# Altium PCB HV_Module.PCBDOC (part 1 of 2)
Units mm, origin at the board's own origin, x right, y up, seen from the top; angles counter-clockwise.
Board outline 118 x 86 mm, 4 copper layers (Top, GP1(GND), L3, Bot), stack 1.648 mm thick; 254 components, 171 nets, 762 pads, 0 vias.
Unrouted connection lines stored in the file: 464.
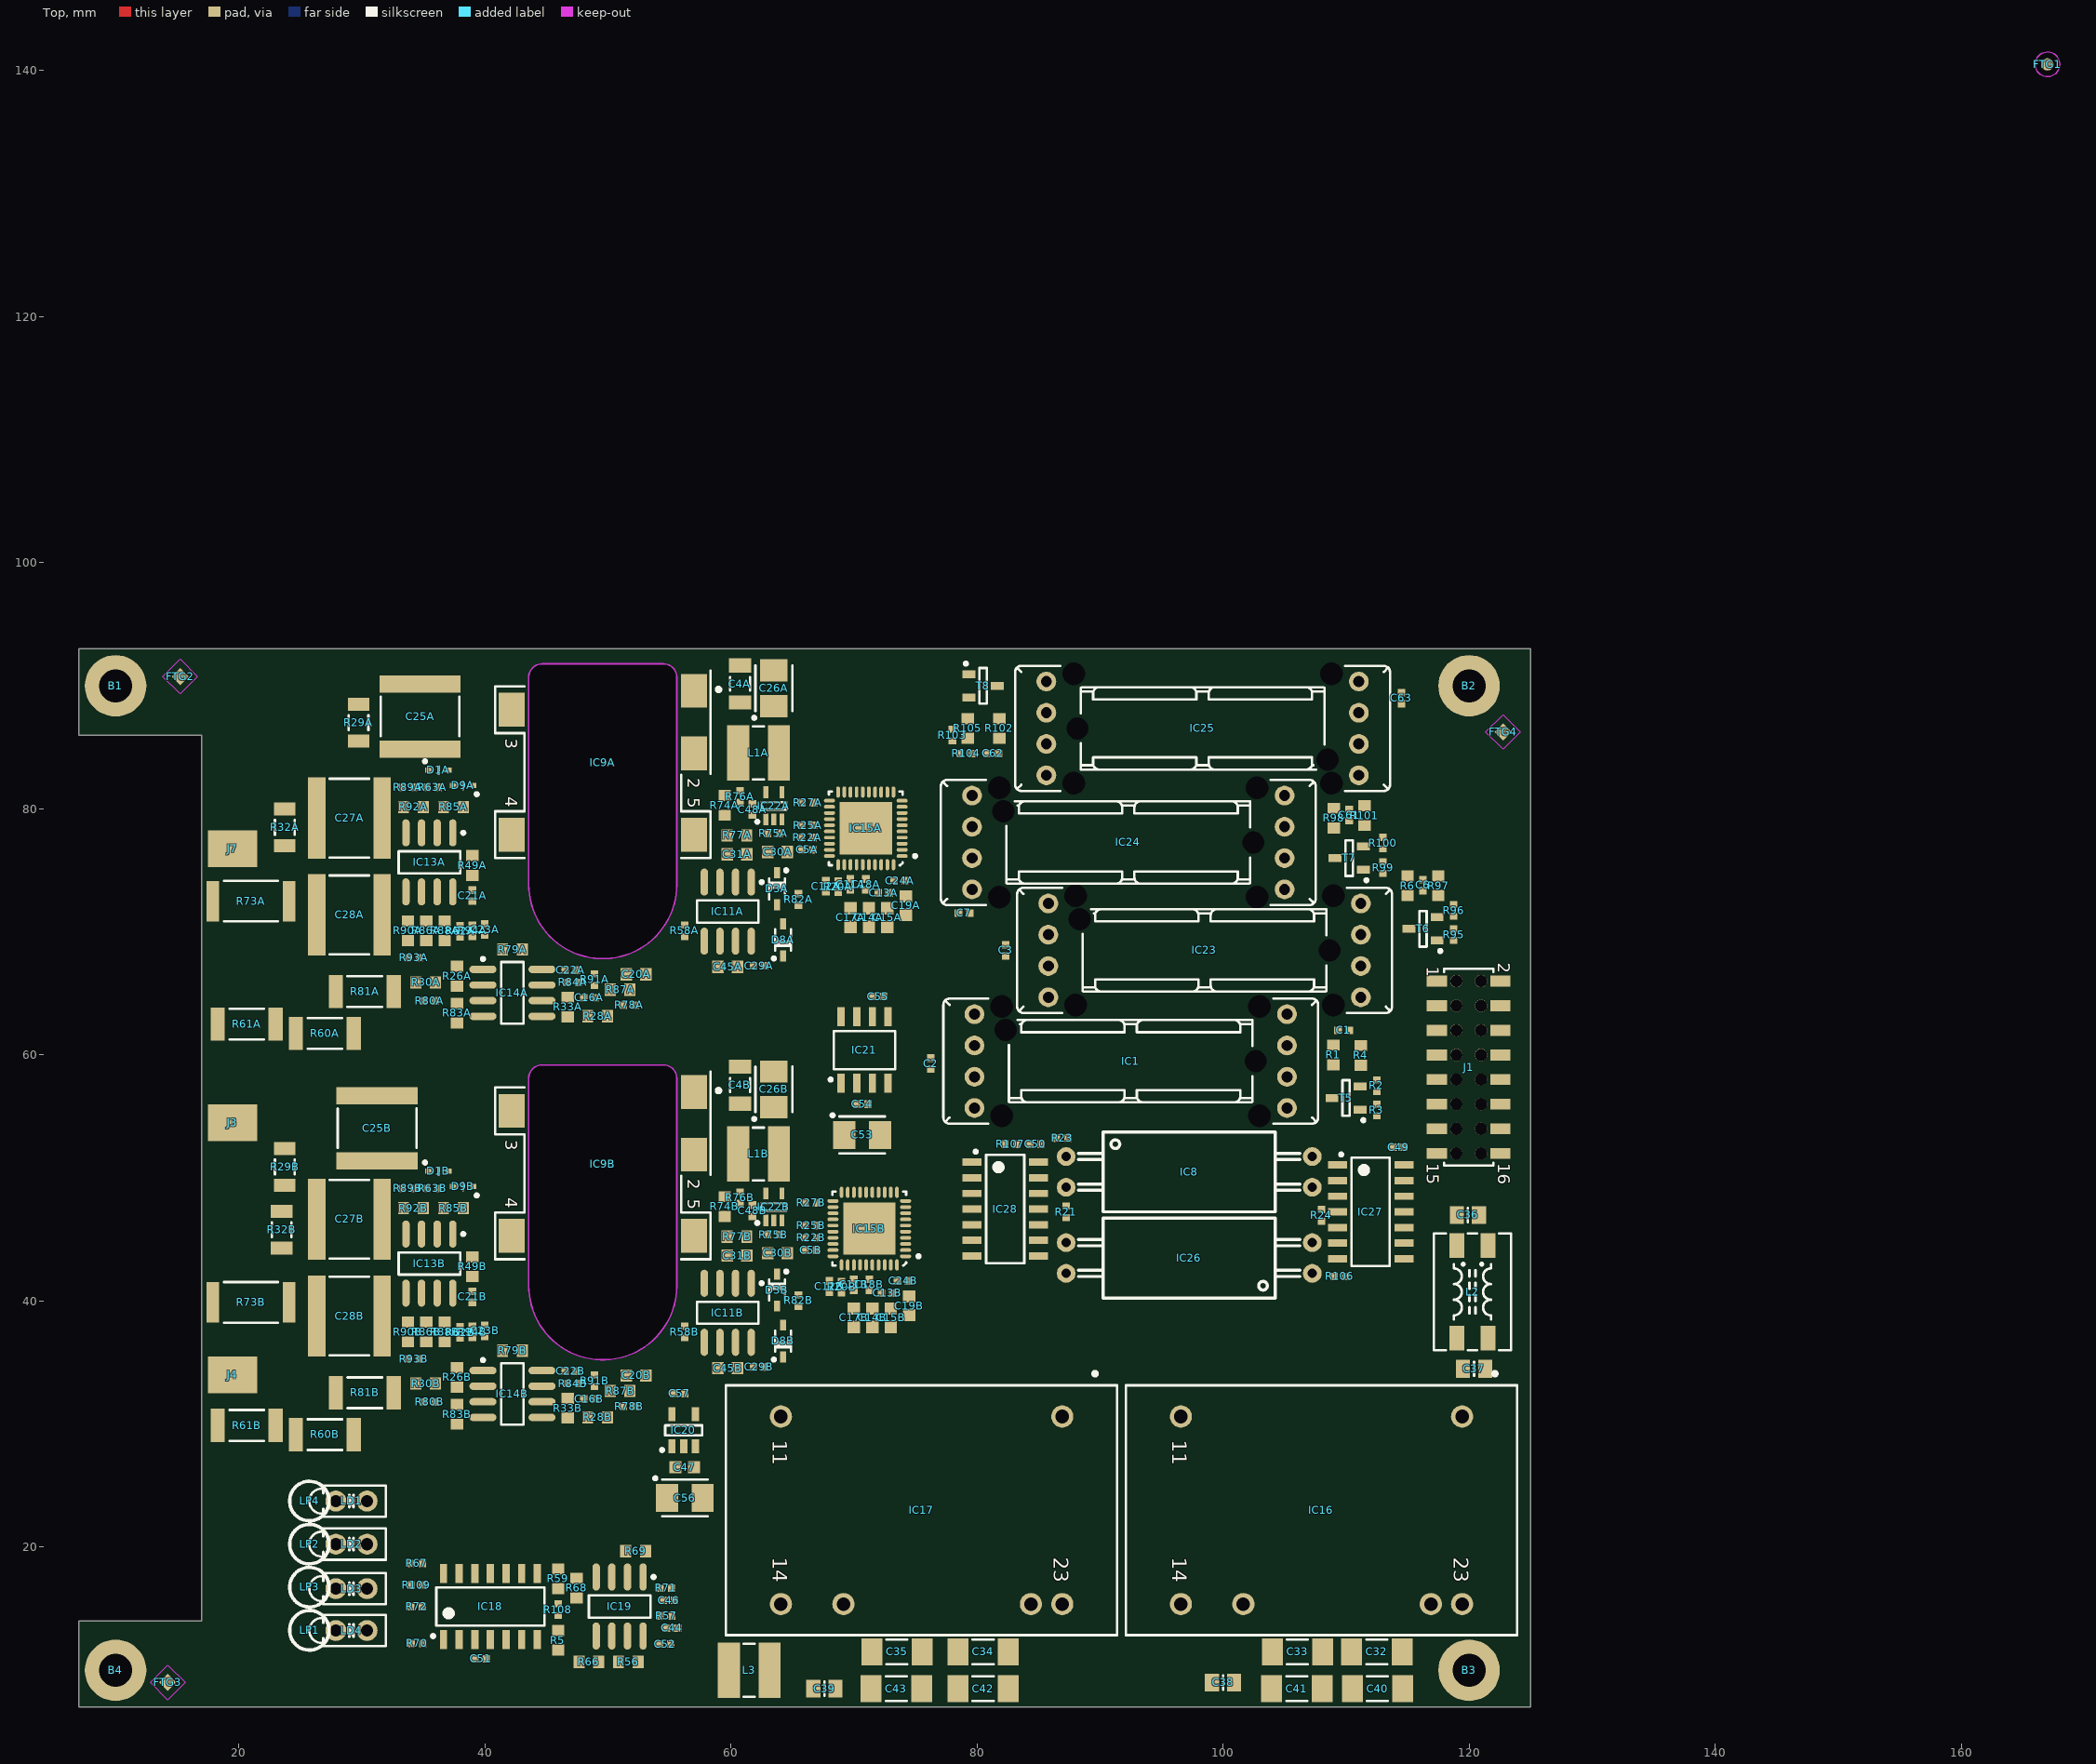
[diagram p0: Top view]
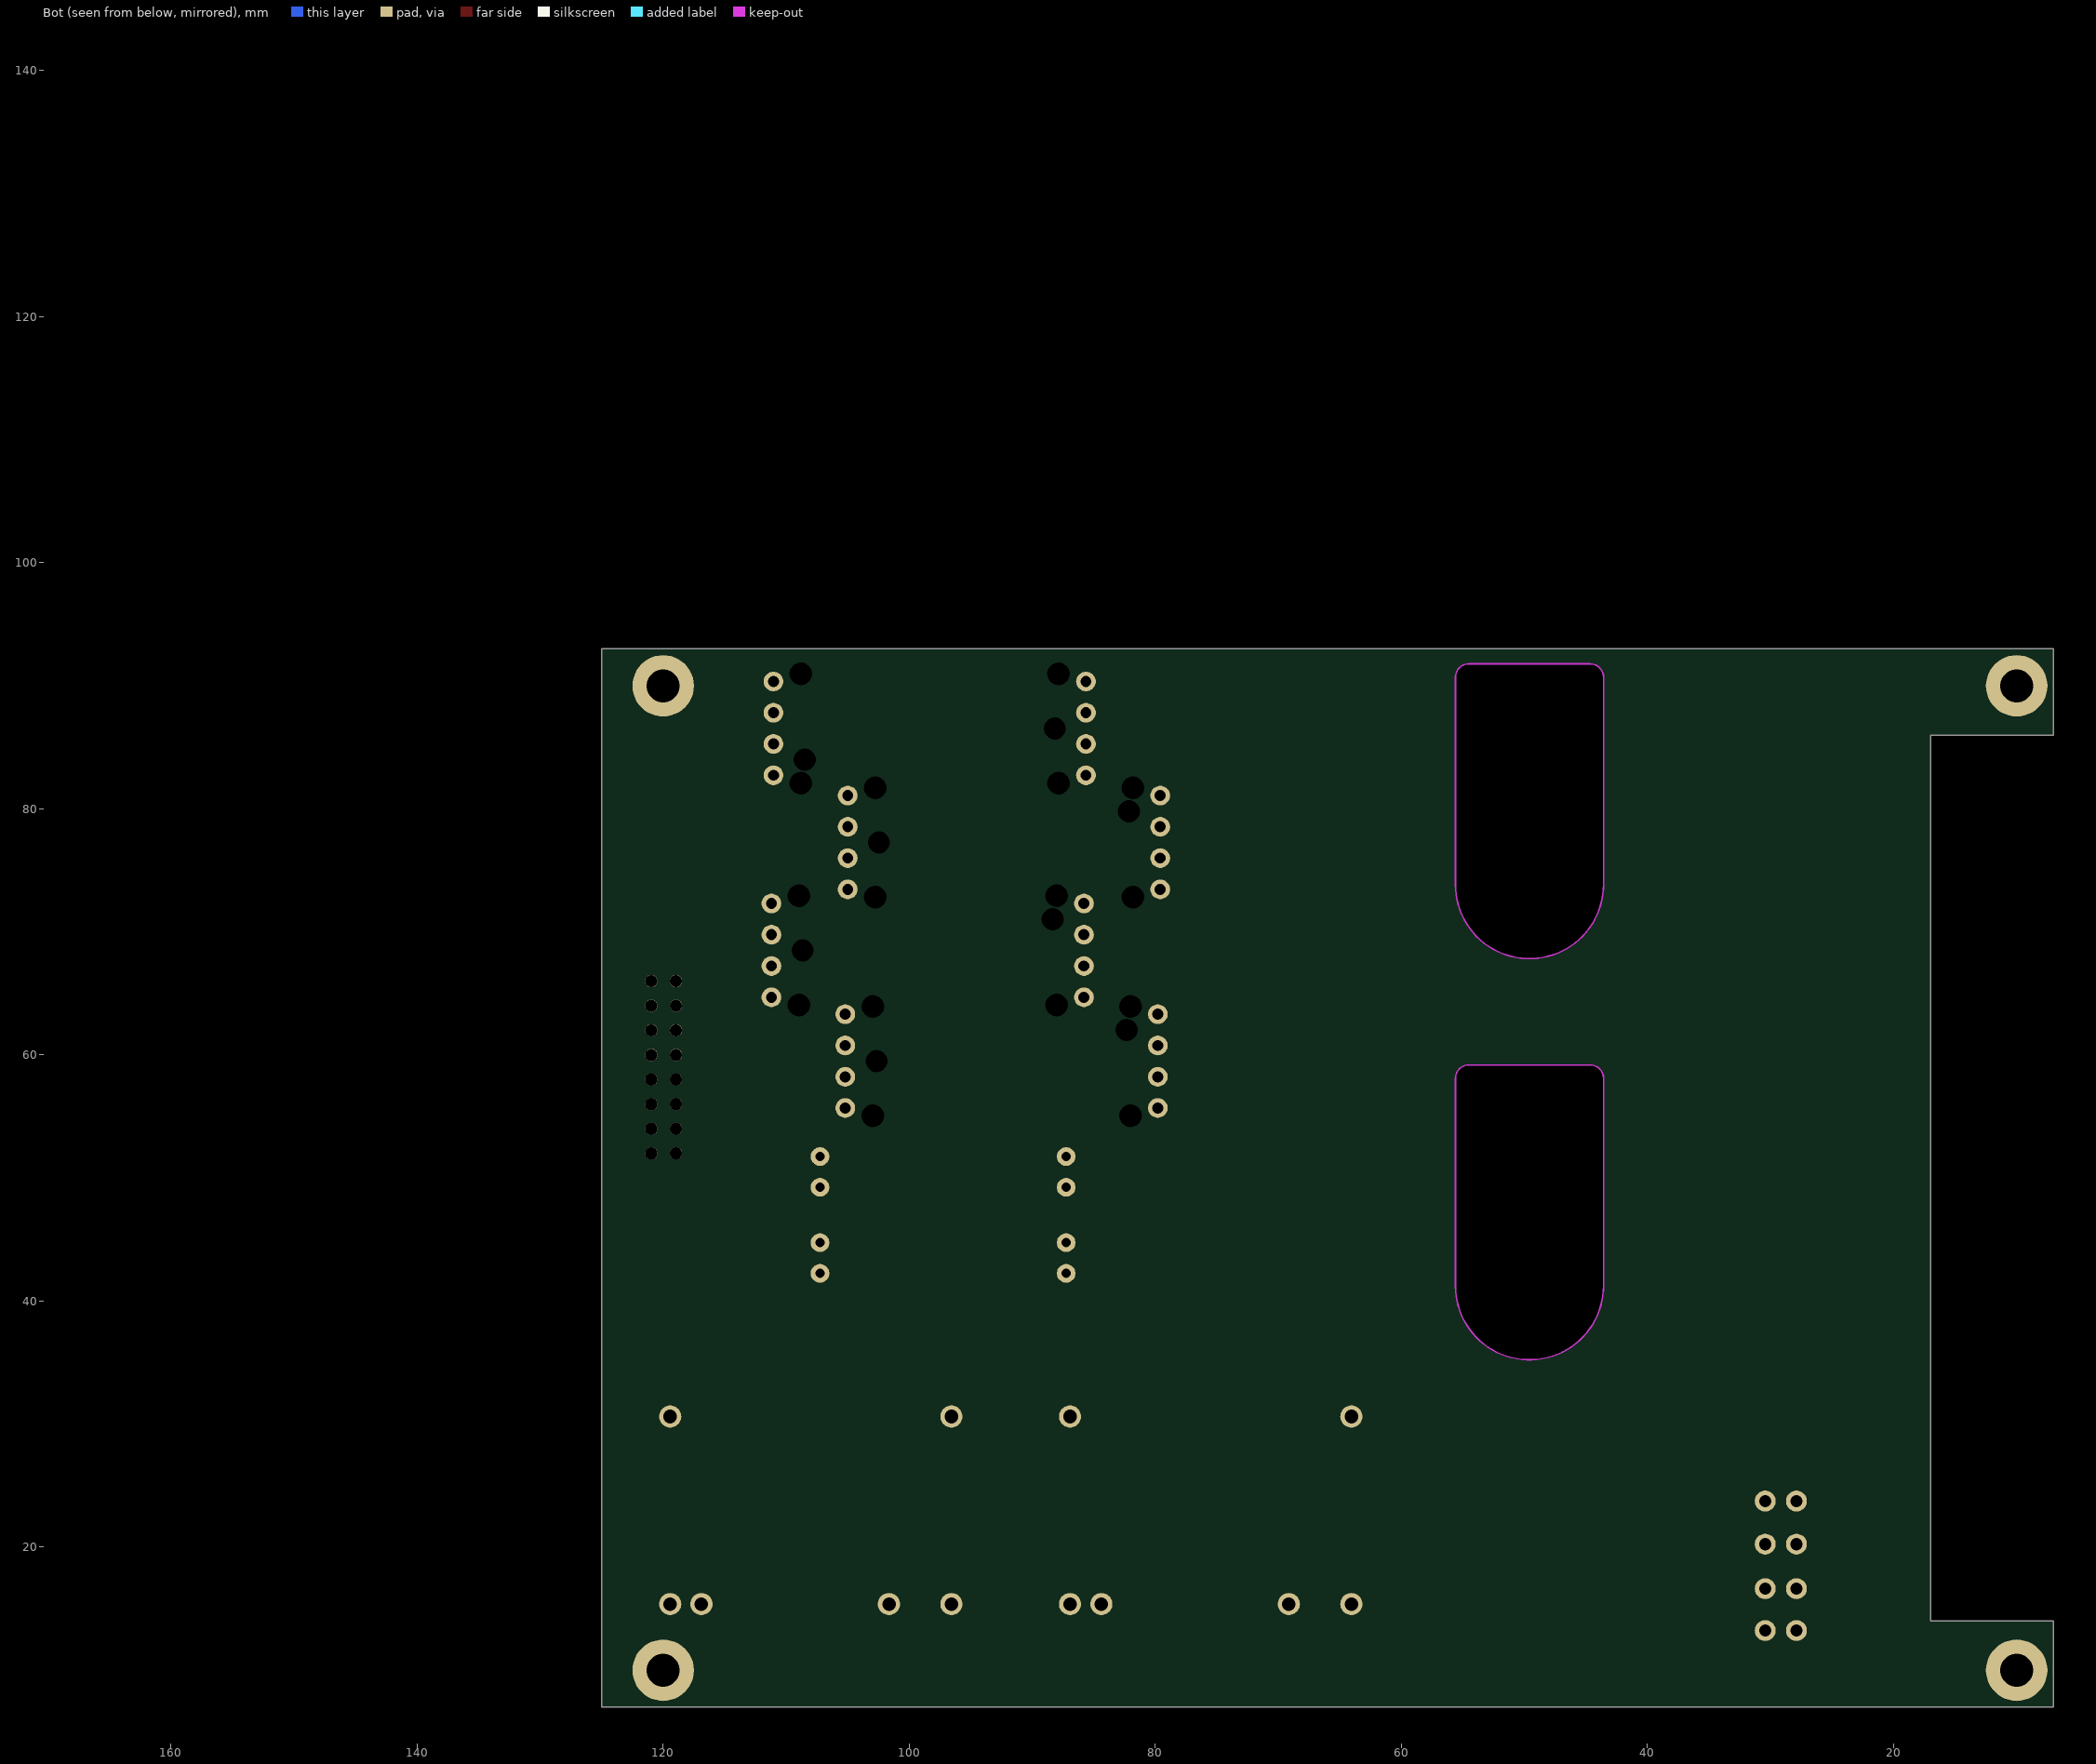
[diagram p1: Bot view, seen from below]
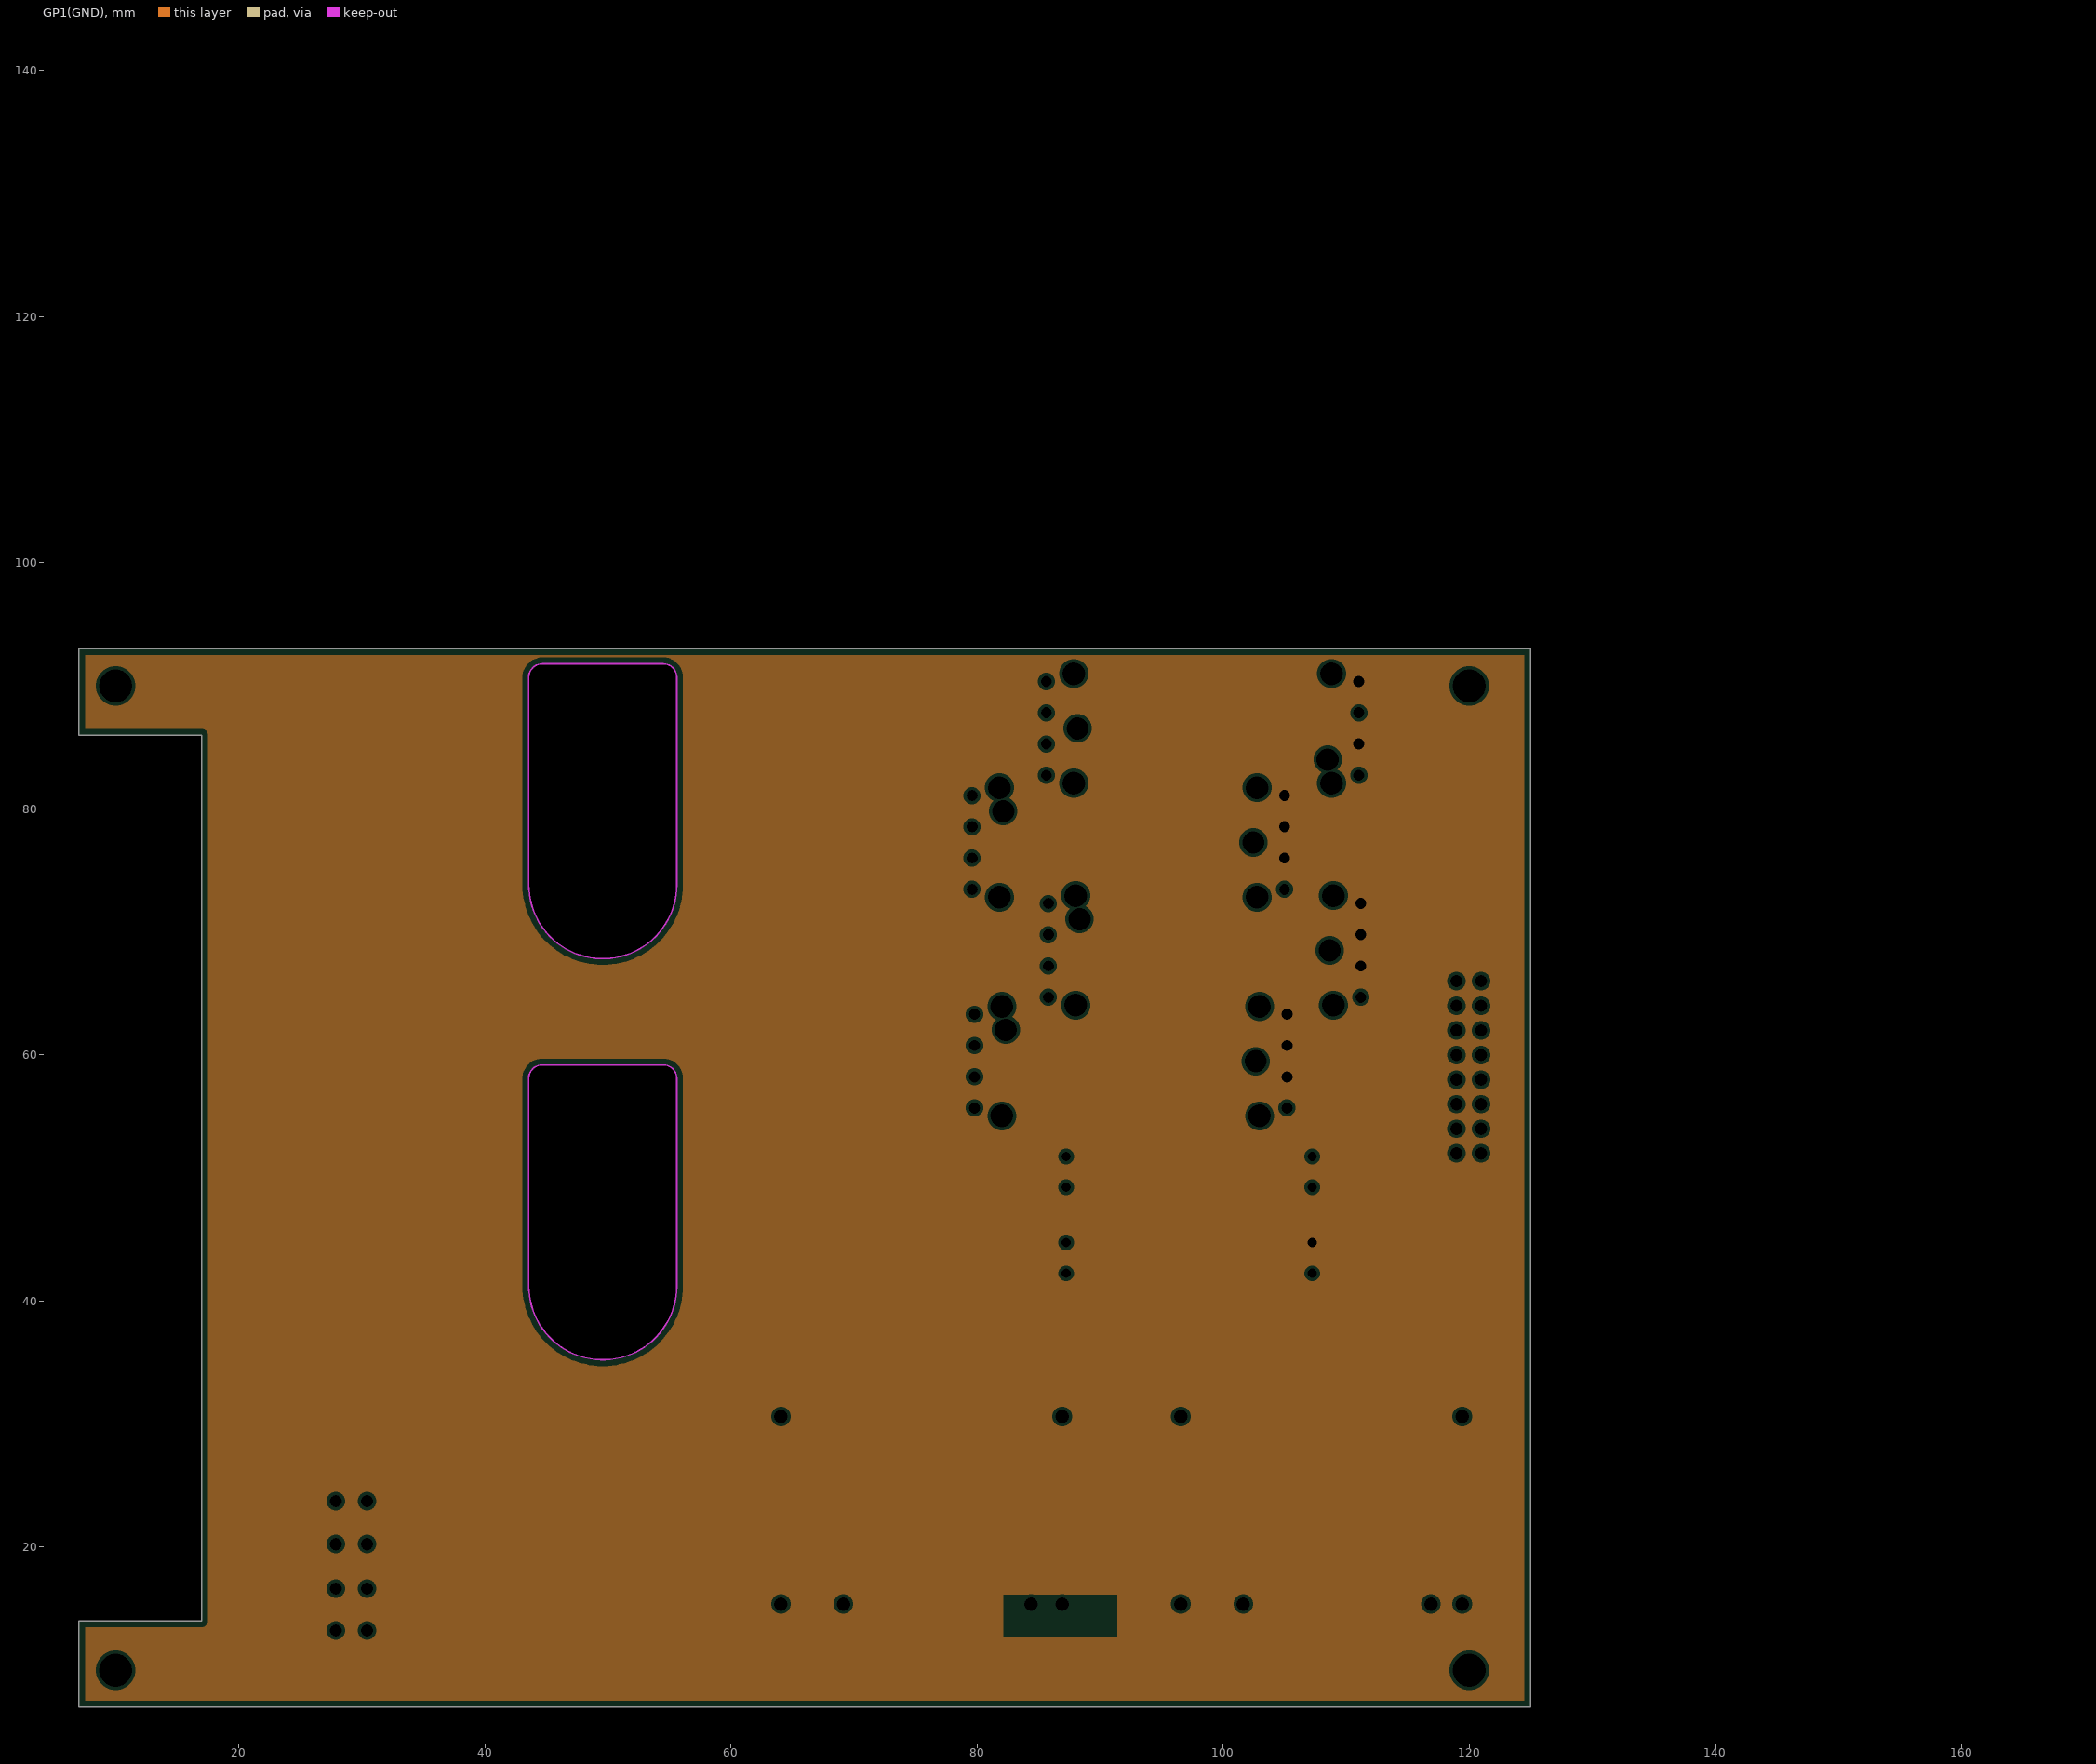
[diagram p2: GP1(GND), clearances drawn from the general rule]

## Layer stack, top to bottom
TopSolder: solder mask 0.0102, Solder Resist, Dk 3.5
Top: signal copper 0.058
Dielectric1: core 0.18, FR-4, Dk 4.2
GP1(GND): plane copper 0.036, net GND
Dielectric 3: prepreg 1.1, FR-4, Dk 4.2
L3: signal copper 0.036
Dielectric2: core 0.18, FR-4, Dk 4.2
Bot: signal copper 0.058
BottomSolder: solder mask 0.0102, Solder Resist, Dk 3.5

## Board outline
7,7 7,14 17,14 17,86 7,86 7,93 125,93 125,7

## Design rules (kind name [scope] priority, off if disabled: settings)
AcuteAngle [All] p1: minimum=6.00000000000000E+0001 checktracksonly=FALSE
BoardOutlineClearance [not (OnLayer('TopOverlay')  or  OnLayer('BottomOverlay') )] p1: gap=0.254 ignorepadtopadclearanceinfootprint=FALSE except(0: Arc-SplitContinuation Track-SplitContinuation SMDPad-SplitContinuation THPad-SplitContinuation Via-SplitContinuation Fill-SplitContinuation Poly-SplitContinuation Region-SplitContinuation Text-SplitContinuation)
Clearance Clearance_HV [InNetClass('HV') vs not InNetClass('HV')] p1: gap=1 ignorepadtopadclearanceinfootprint=FALSE
Clearance Clearance_balancing [InNamedPolygon('balancing')            or InNamedPolygon('balancing_top')] p2: gap=0.3 ignorepadtopadclearanceinfootprint=FALSE
Clearance Clearance_DIFF [(InDifferentialPairClass('All Differential Pairs'))] p3: gap=0.127 ignorepadtopadclearanceinfootprint=FALSE except(0: Arc-Hole Track-Hole SMDPad-Hole THPad-Hole Via-Hole Fill-Hole Poly-Hole Region-Hole Text-Hole; 0.254: Arc-Poly Track-Poly SMDPad-Poly THPad-Poly Via-Poly Fill-Poly Poly-Poly Poly-Region Poly-Text)
Clearance [All] p4: gap=0.127 ignorepadtopadclearanceinfootprint=FALSE except(0: Arc-Hole Track-Hole SMDPad-Hole THPad-Hole Via-Hole Fill-Hole Poly-Hole Region-Hole Text-Hole; 0.381: Arc-Poly Track-Poly SMDPad-Poly THPad-Poly Via-Poly Fill-Poly Poly-Poly)
ComponentClearance [All] p1 off: gap=0.254 collisioncheckmode=3 verticalgap=0.254 showdistances=FALSE
DiffPairsRouting [All] p1: maxlimit=0.178 minlimit=0.152 mostfreqgap=0.152 toplayer_minwidth=0.127 toplayer_maxwidth=0.152 toplayer_prefwidth=0.152 midlayer1_minwidth=0.127 midlayer1_maxwidth=0.152 midlayer1_prefwidth=0.152 bottomlayer_minwidth=0.127 bottomlayer_maxwidth=0.152 bottomlayer_prefwidth=0.152 maxuncoupledlength=12.7
FabricationTestPointUsage TestPointUsage [All] p1: valid=0 allowmultiple=FALSE
FabricationTestpoint Testpoint [All] p1: side=3 testpointundercomponent=TRUE minsize=1.016 maxsize=2.54 preferedsize=1.524 minholesize=0.508 maxholesize=1.016 preferedholesize=0.813 testpointgrid=0.025 allowsidetop=TRUE allowsidebottom=TRUE usegrid=TRUE gridtolerance=0
Height [All] p1 off: minheight=0 maxheight=25.4 prefheight=12.7
HoleSize [All] p1: absolutevalues=TRUE maxlimit=3.81 minlimit=0.025 maxpercent=80.000 minpercent=20.000
HoleToHoleClearance [All] p1: gap=0.025 allowstackedmicrovias=TRUE
MinimumSolderMaskSliver [All] p1: minsoldermaskwidth=0
PlaneClearance PlaneClearance_HV [InNetClass('HV')] p1: clearance=1
PlaneClearance [All] p2: clearance=0.254
PlaneConnect [All] p1: planeconnectstyle=Direct reliefexpansion=0.508 reliefentries=4 reliefconductorwidth=0.254 reliefairgap=0.254
PolygonConnect PolygonConnect_pad [(InPadClass('All Pads'))] p1: connectstyle=Relief reliefconductorwidth=0.254 reliefentries=4 polygonreliefangle="90 Angle" airgapwidth=0.254
PolygonConnect [All] p2: connectstyle=Direct reliefconductorwidth=0.254 reliefentries=4 polygonreliefangle="45 Angle" airgapwidth=0.254
RoomDefinition U_HV_PWR_STAGE2 [InComponentClass('U_HV_PWR_STAGE2')] p1: confinementstyle=ConfineIn formatcopy=TRUE lockcomponents=FALSE outline 16.55,26.9 66.8,26.9 66.8,60.65 16.55,60.65
RoomDefinition U_ADC_DAC1 [InComponentClass('U_ADC_DAC1')] p2: confinementstyle=ConfineIn formatcopy=TRUE lockcomponents=FALSE outline 75.22,82.776 65.22,82.776 65.22,69.816 75.22,69.816
RoomDefinition U_HV_PWR_STAGE1 [InComponentClass('U_HV_PWR_STAGE1')] p3: confinementstyle=ConfineIn formatcopy=TRUE lockcomponents=FALSE outline 16.55,59.5 66.8,59.5 66.8,93.25 16.55,93.25
RoomDefinition U_LED_indicators [InComponentClass('U_LED_indicators')] p4: confinementstyle=ConfineIn formatcopy=TRUE lockcomponents=FALSE outline 18,10.3 46,10.3 46,21.8 18,21.8
RoomDefinition U_ADC_DAC2 [InComponentClass('U_ADC_DAC2')] p5: confinementstyle=ConfineIn formatcopy=TRUE lockcomponents=FALSE outline 75.5,50.25 65.5,50.25 65.5,37.29 75.5,37.29
RoomDefinition U_Supply_5V_ISOL [InComponentClass('U_Supply_5V_ISOL')] p6: confinementstyle=ConfineIn formatcopy=TRUE lockcomponents=FALSE outline 55.25,6 124.75,6 124.75,37.25 55.25,37.25
RoomDefinition U_Isolators [InComponentClass('U_Isolators')] p7: confinementstyle=ConfineIn formatcopy=TRUE lockcomponents=FALSE outline 75,37.5 115.75,37.5 115.75,92.5 75,92.5
RoomDefinition HV_Module [InComponentClass('HV_Module')] p8: confinementstyle=ConfineIn formatcopy=TRUE lockcomponents=FALSE outline 115.25,46.25 125,46.25 125,75.75 115.25,75.75
RoutingVias [All] p1: holewidth=0.2 width=0.5 viastyle="Through Hole" minholewidth=0.2 minwidth=0.5 maxholewidth=0.711 maxwidth=1.27
SilkToSilkClearance [All] p1: silktosilkclearance=0
SilkToSolderMaskClearance SilkscreenOverComponentPads [IsPad] p1: minsilkscreentomaskgap=0 clearancetoexposedcopper=TRUE
SolderMaskExpansion [All] p1: expansion=0.051 istentingtop=FALSE
Width Z50R [InNetClass('SPI')] p1: maxlimit=0.298 minlimit=0.221 preferedwidth=0.302 toplayer_minwidth=0.298 midlayer1_maxwidth=0.221 midlayer1_prefwidth=0.225 bottomlayer_minwidth=0.298 impedanceprofiledriven=TRUE impedanceprofileid={0EAE177B-5537-4F3A-BB17-587E98DE51B5} impedanceprofilevalue=50.000000 minimp=50.000000 maximp=50.000000 favimp=50.000000
Width [All] p2: maxlimit=1.27 minlimit=0.127 preferedwidth=0.127
18 further rules are at their usual default settings.

## Classes and differential pairs
component class U_LED_indicators: C44 C46 C51 C52 IC18 IC19 LD1 LD2 LD3 LD4 LP1 LP2 LP3 LP4 R5 R56 R57 R59 R66 R67 R68 R69 R70 R71 R72 R108 R109
channel class HV_PWR_STAGE: U_HV_PWR_STAGE1 U_HV_PWR_STAGE2
channel class ADC_DAC: U_ADC_DAC1 U_ADC_DAC2
component class U_HV_PWR_STAGE1: C4A C16A C20A C21A C22A C23A C25A C26A C27A C28A C29A C30A C31A C45A C48A D1A D3A D8A D9A IC9A IC11A IC13A IC14A IC22A L1A R26A R28A R29A R30A R32A R33A R49A R58A R60A R61A R62A R63A R73A R74A R75A R76A R77A R78A R79A R80A R81A R82A R83A R84A R85A R86A R87A R88A R89A R90A R91A R92A R93A R94A
component class U_ADC_DAC2: C5B C11B C12B C13B C14B C15B C17B C18B C19B C24B IC15B R20B R22B R25B R27B
component class U_ADC_DAC1: C5A C11A C12A C13A C14A C15A C17A C18A C19A C24A IC15A R20A R22A R25A R27A
component class U_Supply_5V_ISOL: C32 C33 C34 C35 C36 C37 C38 C39 C40 C41 C42 C43 C47 C56 C57 IC16 IC17 IC20 L2 L3
component class U_Isolators: C1 C2 C3 C6 C7 C49 C50 C61 C62 C63 IC1 IC8 IC23 IC24 IC25 IC26 IC27 IC28 R1 R2 R3 R4 R6 R21 R23 R24 R95 R96 R97 R98 R99 R100 R101 R102 R103 R104 R105 R106 R107 T5 T6 T7 T8
component class U_HV_PWR_STAGE2: C4B C16B C20B C21B C22B C23B C25B C26B C27B C28B C29B C30B C31B C45B C48B D1B D3B D8B D9B IC9B IC11B IC13B IC14B IC22B L1B R26B R28B R29B R30B R32B R33B R49B R58B R60B R61B R62B R63B R73B R74B R75B R76B R77B R78B R79B R80B R81B R82B R83B R84B R85B R86B R87B R88B R89B R90B R91B R92B R93B R94B
component class HV_Module: B1 B2 B3 B4 C53 C54 C55 FTG1 FTG2 FTG3 FTG4 IC21 J1 J3 J4 J7

## Components (designator, comment, footprint, x,y, rotation, side; value= is the part's Value field where it differs from the comment)
B1 "Plated Hole" MTG270_500 10,90 r0 top
B2 "Plated Hole" MTG270_500 120,90 r0 top
B3 "Plated Hole" MTG270_500 120,10 r0 top
B4 "Plated Hole" MTG270_500 10,10 r0 top
C1 "1uF" CAPC1005X55N 109.8,62.004 r180 top
C2 "1uF" CAPC1005X55N 76.25,59.3 r90 top
C3 "1uF" CAPC1005X55N 82.34,68.5 r90 top
C4A "22uF" CAPC3216X180N 60.75,90.15 r270 top (schematic designator C4)
C4B "22uF" CAPC3216X180N 60.75,57.55 r270 top (schematic designator C4)
C5A "1uF" CAPC1005X55N 66.22,76.666 r0 top (schematic designator C5)
C5B "1uF" CAPC1005X55N 66.5,44.14 r0 top (schematic designator C5)
C6 "1uF" CAPC1005X55N 116.25,73.8 r90 top
C7 "1uF" CAPC1005X55N 78.95,71.534 r0 top
C11A "10nF" CAPC1005X55N 69.72,73.856 r90 top (schematic designator C11)
C11B "10nF" CAPC1005X55N 70,41.33 r90 top (schematic designator C11)
C12A "1uF" CAPC1005X55N 67.72,73.716 r90 top (schematic designator C12)
C12B "1uF" CAPC1005X55N 68,41.19 r90 top (schematic designator C12)
C13A "1uF" CAPC1005X55N 72.42,73.166 r0 top (schematic designator C13)
C13B "1uF" CAPC1005X55N 72.7,40.64 r0 top (schematic designator C13)
C14A "10uF" CAPC1608X80N 71.22,71.166 r90 top (schematic designator C14)
C14B "10uF" CAPC1608X80N 71.5,38.64 r90 top (schematic designator C14)
C15A "10uF" CAPC1608X80N 72.72,71.166 r90 top (schematic designator C15)
C15B "10uF" CAPC1608X80N 73,38.64 r90 top (schematic designator C15)
C16A "10nF" CAPC1005X55N 48.5,64.65 r180 top (schematic designator C16)
C16B "10nF" CAPC1005X55N 48.5,32.05 r180 top (schematic designator C16)
C17A "10uF" CAPC1608X80N 69.72,71.166 r90 top (schematic designator C17)
C17B "10uF" CAPC1608X80N 70,38.64 r90 top (schematic designator C17)
C18A "100nF" CAPC1005X55N 70.97,73.856 r90 top (schematic designator C18)
C18B "100nF" CAPC1005X55N 71.25,41.33 r90 top (schematic designator C18)
C19A "10uF" CAPC1608X80N 74.22,72.14 r90 top (schematic designator C19)
C19B "10uF" CAPC1608X80N 74.5,39.614 r90 top (schematic designator C19)
C20A "220nF" CAPC1608X87N 52.3,66.55 r180 top (schematic designator C20)
C20B "220nF" CAPC1608X87N 52.3,33.95 r180 top (schematic designator C20)
C21A "100nF" CAPC1005X55N 39,72.951 r90 top (schematic designator C21)
C21B "100nF" CAPC1005X55N 39,40.351 r90 top (schematic designator C21)
C22A "100nF" CAPC1005X55N 46.985,66.9 r180 top (schematic designator C22)
C22B "100nF" CAPC1005X55N 46.985,34.3 r180 top (schematic designator C22)
C23A "10nF" CAPC1005X55N 40,70.189 r270 top (schematic designator C23)
C23B "10nF" CAPC1005X55N 40,37.589 r270 top (schematic designator C23)
C24A "100nF" CAPC1005X55N 73.72,74.166 r180 top (schematic designator C24)
C24B "100nF" CAPC1005X55N 74,41.64 r180 top (schematic designator C24)
C25A "33nF" CAPC5764X279N 34.75,87.5 r90 top (schematic designator C25)
C25B "33nF" CAPC5764X279N 31.25,54.05 r90 top (schematic designator C25)
C26A "22uF" CAPMP3528X210N 63.5,89.8 r90 top (schematic designator C26)
C26B "22uF" CAPMP3528X210N 63.5,57.2 r90 top (schematic designator C26)
C27A "33nF" CAPC5764X279N 29,79.25 r180 top (schematic designator C27)
C27B "33nF" CAPC5764X279N 29,46.65 r180 top (schematic designator C27)
C28A "33nF" CAPC5764X279N 29,71.384 r180 top (schematic designator C28)
C28B "33nF" CAPC5764X279N 29,38.784 r180 top (schematic designator C28)
C29A "100nF" CAPC1005X55N 62.3,67.25 r180 top (schematic designator C29)
C29B "100nF" CAPC1005X55N 62.3,34.65 r180 top (schematic designator C29)
C30A "220nF" CAPC1608X87N 63.8,76.5 r180 top (schematic designator C30)
C30B "220nF" CAPC1608X87N 63.8,43.9 r180 top (schematic designator C30)
C31A "10nF" CAPC1608X87N 60.5,76.3 r180 top (schematic designator C31)
C31B "10nF" CAPC1608X87N 60.5,43.7 r180 top (schematic designator C31)
C32 "330pF" CAPC4620X220N 112.5,11.5 r180 top
C33 "330pF" CAPC4620X220N 106.05,11.5 r180 top
C34 "330pF" CAPC4620X220N 80.5,11.5 r180 top
C35 "330pF" CAPC4620X220N 73.5,11.5 r180 top
C36 "4.7uF" CAPC2012X145N 119.9,47 r0 top
C37 "4.7uF" CAPC2012X145N 120.4,34.5 r0 top
C38 "4.7uF" CAPC2012X145N 100,9 r180 top
C39 "4.7uF" CAPC2012X145N 67.6,8.5 r180 top
C40 "330pF" CAPC4620X220N 112.55,8.5 r180 top
C41 "330pF" CAPC4620X220N 106,8.5 r180 top
C42 "330pF" CAPC4620X220N 80.5,8.5 r180 top
C43 "330pF" CAPC4620X220N 73.45,8.5 r180 top
C44 "1uF" CAPC1005X55N 55.213,13.43 r0 top
C45A "10nF" CAPC1608X87N 59.75,67.15 r180 top (schematic designator C45)
C45B "10nF" CAPC1608X87N 59.75,34.55 r180 top (schematic designator C45)
C46 "1uF" CAPC1005X55N 54.963,15.68 r0 top
C47 "10uF" CAPC1608X80N 56.25,26.5 r180 top
C48A "100nF" CAPC1005X55N 61.75,79.95 r90 top (schematic designator C48)
C48B "100nF" CAPC1005X55N 61.75,47.35 r90 top (schematic designator C48)
C49 "1uF" CAPC1005X55N 114.25,52.5 r180 top
C50 "1uF" CAPC1005X55N 84.75,52.75 r0 top
C51 "1uF" CAPC1005X55N 39.663,10.93 r180 top
C52 "1uF" CAPC1005X55N 54.663,12.13 r180 top
C53 "22uF" CAPMP3528X210N 70.67,53.5 r0 top
C54 "100nF" CAPC1005X55N 70.685,56 r180 top
C55 "100nF" CAPC1005X55N 71.97,64.75 r180 top
C56 "22uF" CAPMP3528X210N 56.263,24 r0 top
C57 "1uF" CAPC1005X55N 55.813,32.5 r180 top
C61 "1uF" CAPC1005X55N 110.25,79.5 r90 top
C62 "1uF" CAPC1005X55N 81.3,84.5 r0 top
C63 "1uF" CAPC1005X55N 114.5,89 r90 top
D1A "VESD01C1-02VHG3" SODFL1608X70N 36.25,83.15 r0 top (schematic designator D1)
D1B "VESD01C1-02VHG3" SODFL1608X70N 36.25,50.55 r0 top (schematic designator D1)
D3A "BAT165" SOD2512X110N 63.75,73.502 r270 top (schematic designator D3)
D3B "BAT165" SOD2512X110N 63.75,40.902 r270 top (schematic designator D3)
D8A "BAT165" SOD2512X110N 64.25,69.347 r90 top (schematic designator D8)
D8B "BAT165" SOD2512X110N 64.25,36.747 r90 top (schematic designator D8)
D9A "VESD01C1-02VHG3" SODFL1608X70N 38.25,81.9 r180 top (schematic designator D9)
D9B "VESD01C1-02VHG3" SODFL1608X70N 38.25,49.3 r180 top (schematic designator D9)
FTG1 "Use only in PCB" FIDUCIAL_TOP_C100-200 167,140.5 r180 top
FTG2 "Use only in PCB" FIDUCIAL_TOP_S100-200 15.25,90.75 r180 top
FTG3 "Use only in PCB" FIDUCIAL_TOP_S100-200 14.25,9 r180 top
FTG4 "Use only in PCB" FIDUCIAL_TOP_S100-200 122.75,86.25 r180 top
IC1 "AFBR-390525RZ" BROADCOM_AFBR-390525RZ 92.5,59.5 r180 top
IC8 "OPI1264C" OPI1264C 97.25,50.5 r180 top
IC9A "AG20P-5" DCDC_XPPOWER_AG0-2KV 49.598,79.805 r270 top (schematic designator IC9)
IC9B "AG20P-5" DCDC_XPPOWER_AG0-2KV 49.598,47.205 r270 top (schematic designator IC9)
IC11A "AD8616AR" ADI-R-8_N 59.75,71.65 r270 top (schematic designator IC11)
IC11B "AD8616AR" ADI-R-8_N 59.75,39.05 r270 top (schematic designator IC11)
IC13A "AD8616AR" ADI-R-8_N 35.5,75.65 r270 top (schematic designator IC13)
IC13B "AD8616AR" ADI-R-8_N 35.5,43.05 r270 top (schematic designator IC13)
IC14A "AD8616AR" ADI-R-8_N 42.25,65.05 r0 top (schematic designator IC14)
IC14B "AD8616AR" ADI-R-8_N 42.25,32.45 r0 top (schematic designator IC14)
IC15A "MAX1329BETL+" QFN50P600X600X80-41N-S425 70.97,78.416 r180 top (schematic designator IC15)
IC15B "MAX1329BETL+" QFN50P600X600X80-41N-S425 71.25,45.89 r180 top (schematic designator IC15)
IC16 "REM5E-1205S/R10/A" DCDC_RECOM_REM5E-XXXXS 108,23 r180 top
IC17 "REM5E-0505S/R10/A" DCDC_RECOM_REM5E-XXXXS 75.5,23 r180 top
IC18 "LP339M/NOPB" SOIC127P600X175-14N 40.463,15.18 r90 top
IC19 "AD8616AR" ADI-R-8_N 50.963,15.18 r270 top
IC20 "NCP703SN33T1G" SOT95P275X110-5N 56.164,29.5 r90 top
IC21 "ADR431ARZ" SOIC127P600X175-8N 70.87,60.4 r90 top
IC22A "74HCT1G125GW" SOT65P210X110-5N 63.5,80.25 r90 top (schematic designator IC22)
IC22B "74HCT1G125GW" SOT65P210X110-5N 63.5,47.65 r90 top (schematic designator IC22)
IC23 "AFBR-390525RZ" BROADCOM_AFBR-390525RZ 98.5,68.5 r180 top
IC24 "AFBR-390525RZ" BROADCOM_AFBR-390525RZ 92.3,77.27 r180 top
IC25 "AFBR-390525RZ" BROADCOM_AFBR-390525RZ 98.34,86.54 r0 top
IC26 "OPI1264C" OPI1264C 97.25,43.5 r0 top
IC27 "SN74LVC14AD" SOIC127P600X175-14N 112,47.25 r0 top
IC28 "SN74LVC14AD" SOIC127P600X175-14N 82.3,47.48 r0 top
J1 "2.00 mm_SMT_Vertical_16 pin" 62131621821 119.964,59.004 r270 top locked
J3 "SMD Pad" R400X300 19.5,54.5 r0 top
J4 "SMD Pad" R400X300 19.5,34 r0 top
J7 "SMD Pad" R400X300 19.5,76.75 r0 top
L1A "10uH" IND_BOURNS_PM43 62.25,84.55 r180 top (schematic designator L1)
L1B "10uH" IND_BOURNS_PM43 62.25,51.95 r180 top (schematic designator L1)
L2 "2x250uH" IND_WURTH_WE-SL2 120.27,40.75 r270 top
L3 "10uH" IND_BOURNS_PM43 61.5,10 r180 top
LD1 "Green" LED_DIALIGHT_555-230 27.9,23.75 r0 top
LD2 "Red" LED_DIALIGHT_555-200 27.9,20.25 r0 top
LD3 "Green" LED_DIALIGHT_555-230 27.9,16.63 r0 top
LD4 "Red" LED_DIALIGHT_555-200 27.9,13.23 r0 top
LP1 "" LEDLP_BIVAR_PLP2-1200 25.75,13.25 r90 top
LP2 "" LEDLP_BIVAR_PLP2-1200 25.75,20.25 r90 top
LP3 "" LEDLP_BIVAR_PLP2-1200 25.75,16.75 r90 top
LP4 "" LEDLP_BIVAR_PLP2-1200 25.75,23.75 r90 top
R1 "390" RESC1608X55N 108.97,60.004 r90 top
R2 "47" RESC1005X40N 112.5,57.5 r90 top
R3 "1k" RESC1005X40N 112.5,55.52 r90 top
R4 "150" RESC1608X55N 111.2,59.97 r270 top
R5 "100k" RESC1608X55N 45.963,12.43 r270 top
R6 "390" RESC1608X55N 115,73.75 r90 top
R20A "0" RESC1005X40N 68.72,73.666 r270 top (schematic designator R20)
R20B "0" RESC1005X40N 69,41.14 r270 top (schematic designator R20)
R21 "330" RESC1005X40N 87.25,47.25 r270 top
R22A "0" RESC1005X40N 66.22,77.666 r180 top (schematic designator R22)
R22B "0" RESC1005X40N 66.5,45.14 r180 top (schematic designator R22)
R23 "330" RESC1005X40N 86.93,53.25 r180 top
R24 "330" RESC1005X40N 108,46.97 r90 top
R25A "0" RESC1005X40N 66.25,78.666 r180 top (schematic designator R25)
R25B "0" RESC1005X40N 66.53,46.14 r180 top (schematic designator R25)
R26A "10k" RESC1608X55N 37.75,66.4 r270 top (schematic designator R26)
R26B "10k" RESC1608X55N 37.75,33.8 r270 top (schematic designator R26)
R27A "0" RESC1005X40N 66.25,80.5 r180 top (schematic designator R27)
R27B "0" RESC1005X40N 66.53,47.974 r180 top (schematic designator R27)
R28A "10k" RESC1608X55N 49.172,63.15 r0 top (schematic designator R28)
R28B "10k" RESC1608X55N 49.172,30.55 r0 top (schematic designator R28)
R29A "100k" RESC3216X50N 29.75,87 r270 top (schematic designator R29)
R29B "100k" RESC3216X50N 23.75,50.9 r270 top (schematic designator R29)
R30A "10k" RESC1608X55N 35.2,65.9 r180 top (schematic designator R30)
R30B "10k" RESC1608X55N 35.2,33.3 r180 top (schematic designator R30)
R32A "100k" RESC3216X50N 23.75,78.5 r270 top (schematic designator R32)
R32B "100k" RESC3216X50N 23.5,45.8 r270 top (schematic designator R32)
R33A "15k" RESC1608X55N 46.75,63.9 r270 top (schematic designator R33)
R33B "15k" RESC1608X55N 46.75,31.3 r270 top (schematic designator R33)
R49A "10k" RESC1608X55N 39,75.4 r90 top (schematic designator R49)
R49B "10k" RESC1608X55N 39,42.8 r90 top (schematic designator R49)
R56 "100k" RESC1608X55N 51.663,10.68 r180 top
R57 "1k" RESC1005X40N 54.743,14.43 r0 top
R58A "1k" RESC1005X40N 56.25,70.089 r90 top (schematic designator R58)
R58B "1k" RESC1005X40N 56.25,37.489 r90 top (schematic designator R58)
R59 "100k" RESC1608X55N 45.963,17.43 r270 top
R60A "10M" RESC5025X65N 27,61.75 r180 top (schematic designator R60)
R60B "10M" RESC5025X65N 27,29.15 r180 top (schematic designator R60)
R61A "10M" RESC5025X65N 20.65,62.5 r180 top (schematic designator R61)
R61B "10M" RESC5025X65N 20.65,29.9 r180 top (schematic designator R61)
R62A "10k" RESC1005X40N 38,70.056 r270 top (schematic designator R62)
R62B "10k" RESC1005X40N 38,37.456 r270 top (schematic designator R62)
R63A "1k" RESC1005X40N 35.75,81.75 r180 top (schematic designator R63)
R63B "1k" RESC1005X40N 35.75,49.15 r180 top (schematic designator R63)
R66 "100k" RESC1608X55N 48.463,10.68 r180 top
R67 "1k" RESC1005X40N 34.463,18.68 r0 top
R68 "100k" RESC1608X55N 47.463,16.68 r270 top
R69 "100k" RESC1608X55N 52.263,19.68 r180 top
R70 "1k" RESC1005X40N 34.493,12.18 r0 top
R71 "1k" RESC1005X40N 54.713,16.68 r0 top
R72 "1k" RESC1005X40N 34.463,15.18 r0 top
R73A "100" RESC6331X70N 21,72.501 r180 top (schematic designator R73)
R73B "100" RESC6331X70N 21,39.901 r180 top (schematic designator R73)
R74A "1k" RESC1608X55N 59.5,80.28 r270 top (schematic designator R74)
R74B "1k" RESC1608X55N 59.5,47.68 r270 top (schematic designator R74)
R75A "10k" RESC1005X40N 63.47,78 r0 top (schematic designator R75)
R75B "10k" RESC1005X40N 63.47,45.4 r0 top (schematic designator R75)
R76A "1k" RESC1005X40N 60.75,81 r90 top (schematic designator R76)
R76B "1k" RESC1005X40N 60.75,48.4 r90 top (schematic designator R76)
R77A "100k" RESC1608X55N 60.5,77.839 r180 top (schematic designator R77)
R77B "100k" RESC1608X55N 60.5,45.239 r180 top (schematic designator R77)
R78A "1k" RESC1005X40N 51.735,64.05 r180 top (schematic designator R78)
R78B "1k" RESC1005X40N 51.735,31.45 r180 top (schematic designator R78)
R79A "10k" RESC1608X55N 42.25,68.567 r180 top (schematic designator R79)
R79B "10k" RESC1608X55N 42.25,35.967 r180 top (schematic designator R79)
R80A "0" RESC1005X40N 35.5,64.4 r180 top (schematic designator R80)
R80B "0" RESC1005X40N 35.5,31.8 r180 top (schematic designator R80)
R81A "10M" RESC5025X65N 30.25,65.15 r180 top (schematic designator R81)
R81B "10M" RESC5025X65N 30.25,32.55 r180 top (schematic designator R81)
R82A "1k" RESC1005X40N 65.5,72.642 r90 top (schematic designator R82)
R82B "1k" RESC1005X40N 65.5,40.042 r90 top (schematic designator R82)
R83A "10k" RESC1608X55N 37.75,63.4 r90 top (schematic designator R83)
R83B "10k" RESC1608X55N 37.75,30.8 r90 top (schematic designator R83)
R84A "1k" RESC1005X40N 47.151,65.9 r180 top (schematic designator R84)
R84B "1k" RESC1005X40N 47.151,33.3 r180 top (schematic designator R84)
R85A "10k" RESC1608X55N 37.45,80.15 r180 top (schematic designator R85)
R85B "10k" RESC1608X55N 37.45,47.55 r180 top (schematic designator R85)
R86A "240k" RESC1608X55N 35.25,70.089 r90 top (schematic designator R86)
R86B "240k" RESC1608X55N 35.25,37.489 r90 top (schematic designator R86)
R87A "100k" RESC1608X55N 51,65.3 r180 top (schematic designator R87)
R87B "100k" RESC1608X55N 51,32.7 r180 top (schematic designator R87)
R88A "10k" RESC1608X55N 36.75,70.089 r270 top (schematic designator R88)
R88B "10k" RESC1608X55N 36.75,37.489 r270 top (schematic designator R88)
R89A "1k" RESC1005X40N 33.75,81.75 r0 top (schematic designator R89)
R89B "1k" RESC1005X40N 33.75,49.15 r0 top (schematic designator R89)
R90A "240k" RESC1608X55N 33.75,70.089 r90 top (schematic designator R90)
R90B "240k" RESC1608X55N 33.75,37.489 r90 top (schematic designator R90)
R91A "1k" RESC1005X40N 48.922,66.12 r90 top (schematic designator R91)
R91B "1k" RESC1005X40N 48.922,33.52 r90 top (schematic designator R91)
R92A "10k" RESC1608X55N 34.2,80.15 r0 top (schematic designator R92)
R92B "10k" RESC1608X55N 34.2,47.55 r0 top (schematic designator R92)
R93A "10k" RESC1005X40N 34.22,67.9 r180 top (schematic designator R93)
R93B "10k" RESC1005X40N 34.22,35.3 r180 top (schematic designator R93)
R94A "1k" RESC1005X40N 39,70.089 r90 top (schematic designator R94)
R94B "1k" RESC1005X40N 39,37.489 r90 top (schematic designator R94)
R95 "47" RESC1005X40N 118.75,69.77 r270 top
R96 "1k" RESC1005X40N 118.75,71.75 r270 top
R97 "150" RESC1608X55N 117.5,73.75 r270 top
R98 "390" RESC1608X55N 109,79.25 r90 top
R99 "47" RESC1005X40N 113,75.22 r270 top
R100 "1k" RESC1005X40N 113,77.22 r270 top
R101 "150" RESC1608X55N 111.5,79.45 r270 top
R102 "390" RESC1608X55N 81.83,86.54 r270 top
R103 "47" RESC1005X40N 78,86 r90 top
R104 "1k" RESC1005X40N 79.13,84.5 r180 top
R105 "150" RESC1608X55N 79.25,86.54 r90 top
R106 "330" RESC1005X40N 109.5,42 r0 top
R107 "10k" RESC1005X40N 82.75,52.75 r0 top
R108 "10k" RESC1005X40N 45.963,14.93 r270 top
R109 "1k" RESC1005X40N 34.463,16.93 r0 top
T5 "2N7002" SOT95P240X130-3N 110,56.5 r180 top
T6 "2N7002" SOT95P240X130-3N 116.25,70.25 r180 top
T7 "2N7002" SOT95P240X130-3N 110.25,76 r180 top
T8 "2N7002" SOT95P240X130-3N 80.5,90 r0 top

## Footprints (in the part's own frame and the unit in brackets; to place one, negate y for a bottom-side part, rotate by r counter-clockwise, add the part's x,y. Pads: shape width x height; smd on the part's side, far side on the other; paste and mask are expansions set on the pad)
62131621821 [mm] "Socket Header, Pitch 2.00 mm, SMT, Vertical, dual row, 16p"
  rect 0.89x1.65 smd: 1(-7,-2.575) 2(-7,2.575) 3(-5,-2.575) 4(-5,2.575) 5(-3,-2.575) 6(-3,2.575) 7(-1,-2.575) 8(-1,2.575) 9(1,-2.575) 10(1,2.575) 11(3,-2.575) 12(3,2.575) 13(5,-2.575) 14(5,2.575) 15(7,-2.575) 16(7,2.575)
  round 1 hole 1 unplated: M1(-7,-1) M2(-7,1) M3(-5,-1) M4(-5,1) M5(-3,-1) M6(-3,1) M7(-1,-1) M8(-1,1) M9(1,-1) M10(1,1) M11(3,-1) M12(3,1) M13(5,-1) M14(5,1) M15(7,-1) M16(7,1)
  silkscreen extent -8,-2 8,2, body extent -8,-3 8,3, height 2.95
ADI-R-8_N [mm] "SOIC, 8-Leads, Body 4.9x3.9mm, Pitch 1.27mm, IPC Medium Density"
  oval 2.2x0.6 smd: 1(-2.4,1.905) 2(-2.4,0.635) 3(-2.4,-0.635) 4(-2.4,-1.905) 5(2.4,-1.905) 6(2.4,-0.635) 7(2.4,0.635) 8(2.4,1.905)
  silkscreen extent -2.52,-2.5 0.9,2.88, body extent -2,-2.5 2,2.5, height 1.75
BROADCOM_AFBR-390525RZ [mm] "BROADCOM AFBR-390525RZ Case, Body 30.46mm L X 10.16mm W X 6.7mm H"
  round 1.6 hole 0.9: 1(-12.7,3.81) 2(-12.7,1.27) 3(-12.7,-1.27) 4(-12.7,-3.81) 5(12.7,3.81) 6(12.7,1.27) 7(12.7,-1.27) 8(12.7,-3.81)
  round 1 hole 1.85 unplated mask+0.425: 9(-10.47,4.45) 11(-10.47,-4.45) 12(10.47,4.45) 14(10.47,-4.45)
  round 1 hole 1.8 unplated mask+0.4: 10(-10.16,0) 13(10.16,-2.54)
  silkscreen extent -15.23,-5.08 15.23,5.08, body extent -15.23,-5.08 15.23,5.08, height 6.7
CAPC1005X55N [mm] "Capacitor, Non-Polarized, Chip; 1.00mm L X 0.50mm W X 0.70mm H, IPC Medium Density"
  rect 0.62x0.62 smd: 1(-0.45,0) 2(0.45,0)
  body extent -0.52,-0.27 0.53,0.28, height 0.55
CAPC1608X80N [mm] "Chip Capacitor, Body 1.6x0.8mm IPC Medium Density"
  rect 1x1 smd: 1(-0.75,0) 2(0.75,0)
  body extent -0.87,-0.47 0.88,0.48, height 0.8
CAPC1608X87N [mm] "Chip Capacitor, Body 1.6x0.8mm IPC Medium Density"
  rect 0.95x1 smd: 1(-0.8,0) 2(0.8,0)
  body extent -0.87,-0.47 0.88,0.48, height 0.87
CAPC2012X145N [mm] "Chip Capacitor, Body 2.0x1.45mm, IPC Medium Density"
  rect 1.15x1.45 smd: 1(-0.9,0) 2(0.9,0)
  silkscreen extent 0,-0.58 0,0.58, body extent -1.05,-0.67 1.05,0.68, height 1.45
CAPC3216X180N [mm] "Chip Capacitor, Body 3.2x1.6mm, IPC Medium Density"
  rect 1.15x1.8 smd: 1(-1.5,0) 2(1.5,0)
  silkscreen extent -0.55,-0.8 0.55,0.8, body extent -1.7,-0.9 1.7,0.9, height 1.8
CAPC4620X220N [mm] "Capacitor, Non-Polarized, Chip; 4.6mm L X 2.2mm W X 2.2mm H, IPC Medium Density"
  rect 1.7x2.2 smd: 1(-2.05,0) 2(2.05,0)
  silkscreen extent -0.85,-1 0.85,1, body extent -2.3,-1.1 2.3,1.1, height 2.2
CAPC5764X279N [mm] "Capacitor, Non-Polarized, Chip; 5.72mm L X 6.35mm W X 2.794mm H, IPC Medium Density"
  rect 1.4x6.6 smd: 1(-2.65,0) 2(2.65,0)
  silkscreen extent -1.6,-3.2 1.6,3.2, body extent -2.98,-3.17 2.99,3.18, height 2.79
CAPMP3528X210N [mm] "Capacitor, Polarized, Molded  Body 3.5x2.8mm, IPC Medium Density"
  rect 1.8x2.25 smd: 1(-1.45,0) 2(1.45,0)
  silkscreen extent -2.52,-1.5 1.85,1.72, body extent -1.85,-1.5 1.85,1.5, height 2.1
DCDC_RECOM_REM5E-XXXXS [mm] "REM5E-XXXXS Series, Body 31.8x20.3mm, DIP-24 Package"
  round 1.8 hole 1.1: 2(-11.43,-7.62) 11(11.43,-7.62) 14(11.43,7.62) 16(6.35,7.62) 22(-8.89,7.62) 23(-11.43,7.62)
  silkscreen extent -15.9,-11.25 15.9,10.15, body extent -15.9,-10.15 15.9,10.15, height 10.2
DCDC_XPPOWER_AG0-2KV [mm] "AG Series, DC/HVDC Converter, Body W 11.43mm x L 23.37mm x H 6.35mm"
  rect 2.74x2.11 smd: 1(-9.779,7.402) 2(-4.699,7.402) 3(-8.255,-7.402) 4(1.905,-7.402) 5(1.905,7.402)
  KeepOutLayer board cut-out: -11.987,4.925 -11.905,5.341 -11.669,5.694 -11.316,5.93 -10.9,6.013 -10.9,6.013 -10.903,6.01 5.962,6.01 5.966,6.013 8.575,5.417 10.668,3.748 11.83,1.336 11.83,-1.341 10.668,-3.753 8.575,-5.422 5.966,-6.017 5.966,-6.017 -10.9,-6.017 -10.897,-6.02 -11.313,-5.937 -11.666,-5.701 -11.901,-5.349 -11.984,-4.932 -11.984,-4.932 -11.987,-4.93
  KeepOutLayer lines w0.127: -10.897,-6.02 cw(c-10.897,-4.932) -11.984,-4.932 ; -10.9,-6.017 5.966,-6.017 ccw(c5.966,-0.002) 5.966,6.013 -10.9,6.013 ccw(c-10.9,4.925) -11.987,4.925 -11.987,-4.93
  silkscreen extent -11.43,-8.76 3.81,9.55, body extent -11.68,-8.76 11.68,8.76, height 3.3
FIDUCIAL_TOP_C100-200 [mm] "Round Fiducial Target, Top Layer, 1.0mm, Top Solder 2.0mm, Keepout =2.0mm"
  round 1 smd paste-0.51 mask+0.5: FTG2(0,0)
  Top keep-out circle w0.1: c0,0 r1
FIDUCIAL_TOP_S100-200 [mm] "Square Fiducial Target, Top Layer, 1.0mm, Top Solder 2.0mm, Keepout =2.0mm"
  rect 1x1 smd rot 45 paste-0.51 mask+0.5: 1(0,0)
  Top keep-out region: 1.414,0 0,-1.414 -1.414,0 0,1.414
IND_BOURNS_PM43 [mm] "SMD Inductor  Body Width 4.5mm Body Lenght 4mm Height 3.5mm"
  rect 1.8x4.5 smd: 1(-1.65,0) 2(1.65,0)
  silkscreen extent -0.45,-2.15 0.45,2.15, body extent -2.38,-2.15 2.38,2.15, height 3.5
IND_WURTH_WE-SL2 [mm] "Common Mode SMD Line Filter WE-SL2"
  rect 2x1.2 smd: 1(-3.75,1.27) 2(-3.75,-1.27) 3(3.75,-1.27) 4(3.75,1.27)
  silkscreen extent -4.75,-3.15 4.75,3.15, body extent -4.75,-3.15 4.75,3.15, height 5.3
LED_DIALIGHT_555-200 [mm] "Single 2mm Red LED, Body 5.08x2.54mm, Pin spacing 2.54mm"
  round 1.7 hole 1: 1(2.54,0) 2(0,0)
  silkscreen extent -2.16,-1.27 4.06,1.27, body extent -2.16,-1.27 4.06,1.27, height 6.35
LED_DIALIGHT_555-230 [mm] "Single 2mm Green LED, Body 5.08x2.54mm, Pin spacing 2.54mm"
  round 1.7 hole 1: 1(2.54,0) 2(0,0)
  silkscreen extent -2.16,-1.27 4.06,1.27, body extent -2.16,-1.27 4.06,1.27, height 6.35
LEDLP_BIVAR_PLP2-1200 [mm] "3mm Dome Leens, Single Station Vertivcal Round Lightpipe Height 1.2 in. (30.5mm)"
  silkscreen extent -1.65,-1.65 1.65,1.65, body extent -1.65,0 1.65,31.24, height 4.9
MTG270_500 [mm] "Plated Through Hole: Hole Dia.=2.7mm Pad Dia.=5.0mm"
  round 5 hole 2.7: 1(0,0)
OPI1264C [mil]
  round 60 hole 30: 1(393.7,-49.21) 2(393.7,49.21) 3(-393.7,49.21) 4(-393.7,-49.21)
  silkscreen extent -354,-128 354,128, body extent -403,-129 404,130, height 230
QFN50P600X600X80-41N-S425 [mm] "QFN, 0.50mm Pitch, Square; 40 Pin, 6.00mm L X 6.00mm W X 0.80mm H body (w/Thermal Tab 4.25 x 4.25mm), IPC Medium Density"
  oval 0.9x0.3 smd: 1(-2.95,2.25) 2(-2.95,1.75) 3(-2.95,1.25) 4(-2.95,0.75) 5(-2.95,0.25) 6(-2.95,-0.25) 7(-2.95,-0.75) 8(-2.95,-1.25) 9(-2.95,-1.75) 10(-2.95,-2.25) 21(2.95,-2.25) 22(2.95,-1.75) 23(2.95,-1.25) 24(2.95,-0.75) 25(2.95,-0.25) 26(2.95,0.25) 27(2.95,0.75) 28(2.95,1.25) 29(2.95,1.75) 30(2.95,2.25)
  oval 0.3x0.9 smd: 11(-2.25,-2.95) 12(-1.75,-2.95) 13(-1.25,-2.95) 14(-0.75,-2.95) 15(-0.25,-2.95) 16(0.25,-2.95) 17(0.75,-2.95) 18(1.25,-2.95) 19(1.75,-2.95) 20(2.25,-2.95) 31(2.25,2.95) 32(1.75,2.95) 33(1.25,2.95) 34(0.75,2.95) 35(0.25,2.95) 36(-0.25,2.95) 37(-0.75,2.95) 38(-1.25,2.95) 39(-1.75,2.95) 40(-2.25,2.95)
  rect 4.25x4.25 smd: 41(0,0)
  silkscreen extent -4.13,-3 3,3, body extent -3,-3 3,3, height 0.8
R400X300 [mm] "4mm x  3mm SMD Pad"
  rect 4x3 smd paste-1.5: 1(0,0)
RESC1005X40N [mm] "Chip Resistor, EIA 0402, Metric 1005, Body 1.0x0.5mm, IPC Medium Density"
  rect 0.58x0.62 smd: 1(-0.47,0) 2(0.47,0)
  body extent -0.52,-0.27 0.53,0.28, height 0.4
RESC1608X55N [mm] "Chip Resistor, EIA 0603, Metric 1608, Body 1.6x0.8mm, IPC Medium Density"
  rect 0.9x1 smd: 1(-0.8,0) 2(0.8,0)
  body extent -0.87,-0.47 0.88,0.48, height 0.55
RESC3216X50N [mm] "Chip Resistor, EIA 1206, Metric 3216, Body 3.2x1.6mm, IPC Medium Density"
  rect 1.05x1.75 smd: 1(-1.5,0) 2(1.5,0)
  silkscreen extent -0.6,-0.8 0.6,0.8, body extent -1.67,-0.87 1.68,0.88, height 0.51
RESC5025X65N [mm] "Resistor, Chip; 5mm L X 2.5mm W X 0.65mm H, IPC Medium Density"
  rect 1.15x2.7 smd: 1(-2.35,0) 2(2.35,0)
  silkscreen extent -1.4,-1.25 1.4,1.25, body extent -2.55,-1.32 2.55,1.33, height 0.65
RESC6331X70N [mm] "Chip Resistor, EIA 2512, Metric 6331, 2-Leads, Body 6.3x3.1mm, IPC Medium Density"
  rect 1.05x3.3 smd: 1(-3.1,0) 2(3.1,0)
  silkscreen extent -2.2,-1.65 2.2,1.65, body extent -3.25,-1.65 3.25,1.65, height 0.7
SOD2512X110N [mm] "Small Outline Diode (SOD-323), 1.70mm W X 1.25mm L X 1.10mm H body,  IPC Medium Density"
  rect 0.9x0.5 smd: 1(-1.3,0) 2(1.3,0)
  silkscreen extent -1.62,-0.65 0.85,0.88, body extent -1.35,-0.67 1.35,0.68, height 1.1
SODFL1608X70N [mm] "SODFL (SOD-523) Diode; 1.20mm W X 0.80mm L X 0.70mm H Body, IPC Medium Density"
  rect 0.55x0.42 smd: 1(-0.8,0) 2(0.8,0)
  silkscreen extent -1.22,-0.3 0,0.83, body extent -0.8,-0.4 0.8,0.4, height 0.7
SOIC127P600X175-8N [mm] "SOIC 8, Pitch 1.27mm - Body 4x5mm, IPC Medium Density"
  rect 1.55x0.6 smd: 1(-2.7,1.905) 2(-2.7,0.635) 3(-2.7,-0.635) 4(-2.7,-1.905) 5(2.7,-1.905) 6(2.7,-0.635) 7(2.7,0.635) 8(2.7,1.905)
  silkscreen extent -2.52,-2.5 1.55,2.88, body extent -3.1,-2.5 3.1,2.5, height 1.75
SOIC127P600X175-14N [mm] "SOIC 14, Pitch 1.27mm - Body 4x8.75mm, IPC Medium Density"
  rect 1.55x0.6 smd: 1(-2.7,3.81) 2(-2.7,2.54) 3(-2.7,1.27) 4(-2.7,0) 5(-2.7,-1.27) 6(-2.7,-2.54) 7(-2.7,-3.81) 8(2.7,-3.81) 9(2.7,-2.54) 10(2.7,-1.27) 11(2.7,0) 12(2.7,1.27) 13(2.7,2.54) 14(2.7,3.81)
  silkscreen extent -2.52,-4.4 1.55,4.78, body extent -3.1,-4.37 3.1,4.38, height 1.75
SOT65P210X110-5N [mm] "SOT353, SC70-5, SOT, 0.65mm Pitch, 5 Pin, 1.25mm W X 2.00mm L X 1.10mm H, IPC Medium Density"
  rect 0.95x0.4 smd: 1(-1.1,0.65) 2(-1.1,0) 3(-1.1,-0.65) 4(1.1,-0.65) 5(1.1,0.65)
  silkscreen extent -1.42,-1 0.3,1.47, body extent -1.2,-1.1 1.2,1.1, height 1.1
SOT95P240X130-3N [mm] "SOT23 3-Leads, Pitch 0.95mm - Body 1.3x2.9mm, IPC Medium Density"
  rect 1.05x0.65 smd: 1(-1.15,0.95) 2(-1.15,-0.95) 3(1.15,0)
  silkscreen extent -1.53,-1.45 0.3,1.92, body extent -1.25,-1.5 1.25,1.5, height 1.3
SOT95P275X110-5N [mm] "SOT, 0.95mm Pitch; 5 Pin, 1.50mm W X 3.00mm L X 1.10mm H Body, IPC Medium Density"
  rect 1.15x0.6 smd: 1(-1.3,0.95) 2(-1.3,0) 3(-1.3,-0.95) 4(1.3,-0.95) 5(1.3,0.95)
  silkscreen extent -1.72,-1.5 0.4,1.87, body extent -1.37,-1.5 1.38,1.5, height 1.1